# Altium PCB MainBoard_PCB.PcbDoc
Units mm, origin at the board's own origin, x right, y up, seen from the top; angles counter-clockwise.
Board outline 123.19 x 80.01 mm, 2 copper layers (Top Layer, Bottom Layer); 21 components, 31 nets, 92 pads, 0 vias.
Unrouted connection lines stored in the file: 2.
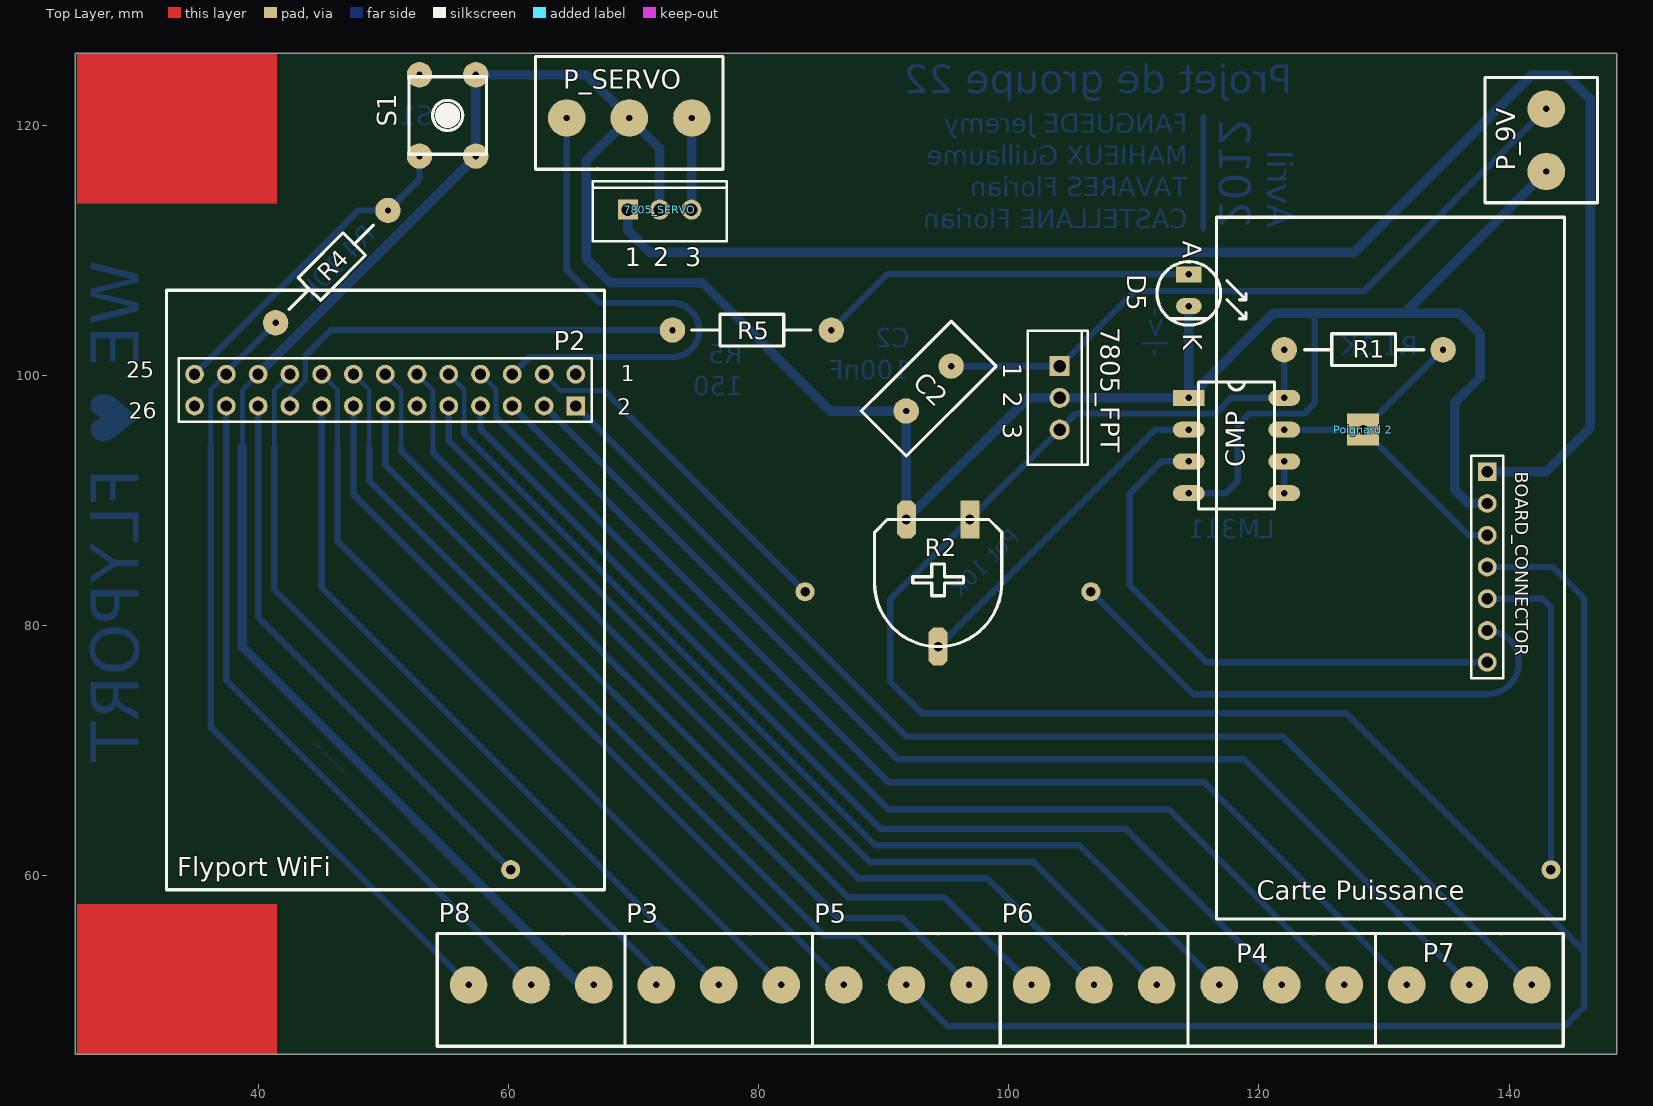
[diagram p0: Top Layer view]
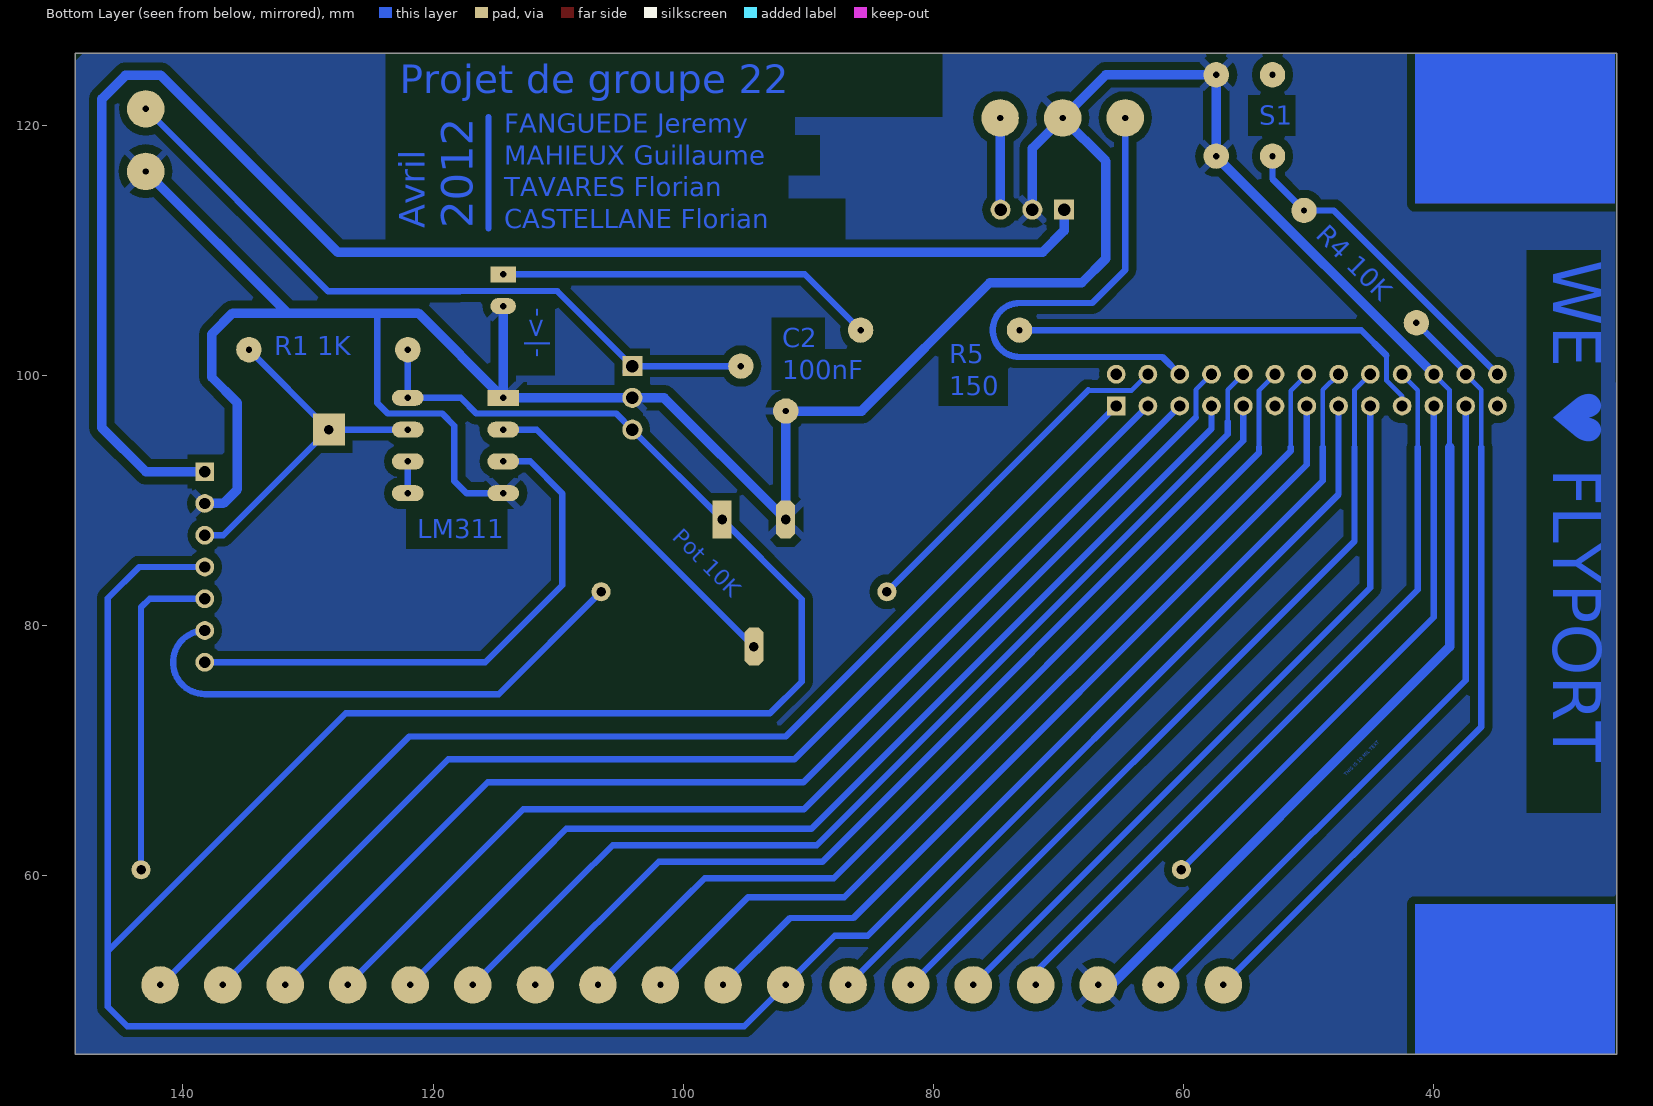
[diagram p1: Bottom Layer view, seen from below]

## Layer stack, top to bottom
Top Layer: signal copper 0.0356
Dielectric: dielectric 0.32, FR-4, Dk 4.8
Bottom Layer: signal copper 0.0356

## Board outline
25.4,125.73 148.59,125.73 148.59,45.72 25.4,45.72

## Design rules (kind name [scope] priority, off if disabled: settings)
Clearance [All] p1: gap=0.305
PlaneConnect [All] p1: planeconnectstyle=Relief reliefexpansion=0.508 reliefentries=4 reliefconductorwidth=0.508 reliefairgap=0.254
PolygonConnect [All] p1: connectstyle=Relief reliefconductorwidth=0.508 reliefentries=4 polygonreliefangle="45 Angle"
RoutingVias [All] p1: holewidth=0.508 width=1.524 viastyle="Through Hole" minholewidth=0.508 minwidth=1.524 maxholewidth=0.508 maxwidth=1.524
SilkscreenOverComponentPads [All] p1: minsilkscreentomaskgap=0.254
SolderMaskExpansion [All] p1: expansion=0.102
Width [All] p1: maxlimit=0.762 minlimit=0.381 preferedwidth=0.508
26 further rules are at their usual default settings.

## Components (designator, comment, footprint, x,y, rotation, side; value= is the part's Value field where it differs from the comment)
7805_FPT "SCR" TO-220-AB 104.075,98.2 r270 top
7805_SERVO "SCR" TO-220-AB 72.1,113.25 r0 top
BOARD_CONNECTOR "7 Pin Connector" HDR1X7 138.25,92.3 r270 top
C2 "Cap2" CAPA2 95.4,100.74 r225 top
CMP "LM311N" DIP8 114.4,98.2 r0 top
D5 "Led" LED 114.4,108.075 r270 top
P2 "Header 13X2" HDR2X13 65.4,97.55 r180 top
P3 "Bornier_3" Bornier_3 69.325,51.275 r0 top
P4 "Bornier_3" Bornier_3 114.325,51.275 r0 top
P5 "Bornier_3" Bornier_3 84.325,51.275 r0 top
P6 "Bornier_3" Bornier_3 99.325,51.275 r0 top
P7 "Bornier_3" Bornier_3 129.325,51.275 r0 top
P8 "Bornier_3" Bornier_3 54.325,51.275 r0 top
P_9V "Alim 9V" Bornier_2 142.975,123.8 r270 top
P_SERVO "Bornier Servomoteur" Bornier_3 77.175,120.575 r180 top
"Poignard 2" "Poignard" Poignard 128.332,95.66 r90 top
R1 "Res2" res5_1/4W 134.722,102.05 r180 top
R2 "RPot" AJUSTABLE 96.9,88.475 r180 top
R4 "Res2" res5_1/4W 41.4,104.2 r45 top
R5 "Res2" res5_1/4W 73.125,103.616 r0 top
S1 "SW-PB" SW_BP 55.15,120.775 r270 top

## Footprints (in the part's own frame and the unit in brackets; to place one, negate y for a bottom-side part, rotate by r counter-clockwise, add the part's x,y. Pads: shape width x height; smd on the part's side, far side on the other; paste and mask are expansions set on the pad)
AJUSTABLE [mil]
  rect 60x120 hole 30: 1(0,0)
  oct 60x120 hole 30: 2(100,400) 3(200,0)
  silkscreen extent -100,0 300,400
Bornier_2 [mm]
  round 3 hole 0.508: 1(2.5,0) 2(7.5,0)
  silkscreen extent 0,-4.9 10,4.1
Bornier_3 [mm]
  round 3 hole 0.508: 1(2.5,0) 2(7.5,0) 3(12.5,0)
  silkscreen extent 0,-4.9 15,4.1
CAPA2 [mil]
  round 80 hole 20: 1(0,0) 2(200,0)
  silkscreen extent -100,-100 300,100
DIP8 [mil]
  rect 100x50 hole 20: 1(0,0)
  oval 100x50 hole 20: 2(0,-100) 3(0,-200) 4(0,-300) 5(300,-300) 6(300,-200) 7(300,-100) 8(300,0)
  silkscreen extent 30,-350 270,50
HDR1X7 [mm] "Connector; Header; 7 Position"
  rect 1.5x1.5 hole 0.9: 1(0,0)
  round 1.5 hole 0.9: 2(2.54,0) 3(5.08,0) 4(7.62,0) 5(10.16,0) 6(12.7,0) 7(15.24,0)
  silkscreen extent -1.27,-1.27 16.51,1.27
HDR2X13 [mm] "Connector; Header; 13x2 Position"
  rect 1.5x1.5 hole 0.9: 1(0,0)
  round 1.5 hole 0.9: 2(0,-2.54) 3(2.54,0) 4(2.54,-2.54) 5(5.08,0) 6(5.08,-2.54) 7(7.62,0) 8(7.62,-2.54) 9(10.16,0) 10(10.16,-2.54) 11(12.7,0) 12(12.7,-2.54) 13(15.24,0) 14(15.24,-2.54) 15(17.78,0) 16(17.78,-2.54) 17(20.32,0) 18(20.32,-2.54) 19(22.86,0) 20(22.86,-2.54) 21(25.4,0) 22(25.4,-2.54) 23(27.94,0) 24(27.94,-2.54) 25(30.48,0) 26(30.48,-2.54)
  silkscreen extent -1.27,-3.81 31.75,1.27
LED [mil]
  rect 50x80 hole 20: 1(0,0)
  oval 50x80 hole 20: 2(100,0)
  silkscreen extent -40,-100 160,180
Poignard [mil]
  rect 100x100 hole 30: 1(0,0)
res5_1/4W [mil]
  round 80 hole 20: 1(0,0) 2(500,0)
  silkscreen extent 60,-50 435,50
SW_BP [mil]
  round 80 hole 20: 1(-127.95,88.58) 2(127.95,88.58) 3(-127.95,-88.58) 4(127.95,-88.58)
  silkscreen extent -122,-122 122,122
TO-220-AB [mm] "TO, Thru-Hole, Vertical, Heatsink Mounted; 3 In-Line Leads; Pitch 2.54 mm"
  rect 1.6x1.6 hole 1: 1(-2.54,0)
  round 1.6 hole 1: 2(0,0) 3(2.54,0)
  silkscreen extent -5.35,-2.55 5.35,2.25

## Part data
7805_FPT 7805_SERVO: "Silicon Controlled Rectifier"
BOARD_CONNECTOR: library part "Header 7", "Header, 7-Pin"
C2: "Capacitor"
CMP: "Voltage Comparator"
D5: "LED"
P2: "Header, 13-Pin, Dual row"
P3 P4 P5 P6 P7 P8: "Header, 3-Pin"
P_9V: library part Bornier_2, "Header, 2-Pin"
P_SERVO: library part Bornier_3, "Header, 3-Pin"
R1 R4 R5: "Resistor"
R2: "Potentiometer"
S1: "Switch"

## Free pads (board coordinates)
  round 1.524 hole 0.762: 2(83.72,82.7) 3(106.575,82.7) 4(143.35,60.475) 5(60.187,60.487)

## Nets (pads, with @x,y where several pads share a name; then routed paths per layer and width w, separated by ;. In a path a pad name is that pad's centre, name@x,y a point inside that pad or via, vN(x,y) a via of type N, cw(c..) or ccw(c..) an arc to the next point about the centre after c; other vN are vias at no path point)
3V3FLYPORT: P2.24 P8.1 R4.1 | length 63.6
  Bottom Layer w0.381: 36.215,94.25 36.215,98.845 P2.24 P2.24@37.46,100.26
  Bottom Layer w0.508: 36.215,94.25 36.215,71.885 P8.1 ; P2.24@37.46,100.26 R4.1
AN1_23: P2.23 P8.2 | length 56.4
  Bottom Layer w0.508: P2.23 37.46,75.64 P8.2
AN4_18: P2.18 P3.3 | length 64
  Bottom Layer w0.381: P2.18 46.35,98.82 46.35,94.241
  Bottom Layer w0.508: 46.35,94.241 46.35,86.75 P3.3
AN5_20: P2.20 P3.1 | length 62
  Bottom Layer w0.381: 41.295,94.241 41.295,98.795 42.54,100.041 P2.20 ; P3.1 P3.1@71.825,52.325
  Bottom Layer w0.508: 41.295,94.241 41.295,82.855 P3.1@71.825,52.325
BOARD_LED: P2.19 R5.1 | length 34.7
  Bottom Layer w0.381: P2.19 42.54,98.329 43.785,99.574 43.785,101.585
  Bottom Layer w0.508: 43.785,101.585 45.816,103.616 R5.1
CURRENT_SENSE: BOARD_CONNECTOR.7 CMP.3 | length 44.2
  Bottom Layer w0.508: CMP.3 112.245,93.12 109.675,90.55 109.675,83.225 115.84,77.06 BOARD_CONNECTOR.7
EN: "Poignard 2.1" BOARD_CONNECTOR.3 CMP.7 R1.1 | length 28.8
  Bottom Layer w0.508: CMP.7 128.332,95.66 ; R1.1 128.332,95.66 ; BOARD_CONNECTOR.3 136.771,87.22 128.332,95.66
GND: 7805_FPT.2 7805_SERVO.2 BOARD_CONNECTOR.2 C2.2 CMP.1 CMP.4 D5.2 P2.22 P8.3 P_9V.2 P_SERVO.2 R2.3 S1.1 S1.2 | length 282
  Bottom Layer w0.381: 38.755,94.241 38.755,98.845 P2.22
  Bottom Layer w0.508: S1.2 S1.2@57.418,117.508 ; P8.3@65.775,51.275 P8.3 ; R2.3@91.808,88.487 R2.3 ; 7805_FPT.2 7805_FPT.2@104.6,98.2 ; CMP.4 117.33,90.58 118.3,91.55 118.3,95.98 ; CMP.1 CMP.1@114.402,98.202 ; 118.305,95.98 119.275,96.95 123.62,96.95 124.46,97.79 124.46,104.975
  Bottom Layer w0.762: 38.75,94.241 38.75,78.3 P8.3@65.775,51.275 ; P2.22 S1.2@57.418,117.508 ; S1.2 S1.1 66.225,124.025 72.1,118.15 7805_SERVO.2 ; P_SERVO.2 66.225,117.125 66.225,109.325 68.15,107.4 75.5,107.4 85.752,97.148 C2.2 R2.3@91.808,88.487 ; R2.3@92.32,88.975 101.545,98.2 7805_FPT.2 ; 7805_FPT.2@104.6,98.2 CMP.1 ; D5.2@114.402,105.535 114.402,98.202 121.175,104.975 124.46,104.975 131.65,104.975 ; BOARD_CONNECTOR.2 136.771,89.76 135.65,90.881 135.65,97.8 137.7,99.85 137.7,103.3 136.025,104.975 132.975,104.975 131.65,104.975 ; P_9V.2 131.65,104.975
I2C_CLK: P2.1 P7.3 | length 95.9
  Bottom Layer w0.508: P2.1 91.825,71.125 121.9,71.125 P7.3@142.025,51
I2C_DATA: P2.3 P7.2 | length 93.1
  Bottom Layer w0.508: P2.3 91.11,69.3 118.8,69.3 P7.2
IN1: P2.5 P7.1 | length 90.7
  Bottom Layer w0.508: P2.5 90.395,67.475 115.625,67.475 P7.1
IN2: P2.7 P4.2 | length 84.3
  Bottom Layer w0.508: P2.7 57.78,95.72 89.75,63.75 109.35,63.75 111.175,61.925 P4.2
IN3: P2.9 P6.3 | length 77.4
  Bottom Layer w0.508: P2.9 55.24,94.76 88.875,61.125 101.975,61.125 P6.3
NetCMP_2: CMP.2 R2.2 | length 27.2
  Bottom Layer w0.508: R2.2 111.705,95.66 CMP.2
NetCMP_5: CMP.5 CMP.6 | length 2.5
  Bottom Layer w0.508: CMP.5 CMP.6
NetD5_1: D5.1 R5.2 | length 30.4
  Bottom Layer w0.508: R5.2 90.284,108.075 D5.1
OUT3_PWM: P2.17 P3.2 | length 59.4
  Bottom Layer w0.508: P2.17 45.08,83.02 P3.2
PWM1: BOARD_CONNECTOR.6 P2.4 pad.2 pad.3 | length 71.1
  Bottom Layer w0.381: P2.4 64.155,98.795 67.625,98.795
  Bottom Layer w0.508: 67.625,98.795 pad.2 ; pad.3 114.755,74.52 138.25,74.52 ccw(c138.25,77.06) BOARD_CONNECTOR.6
PWM2: BOARD_CONNECTOR.5 P2.21 pad.4 pad.5 | length 71.8
  Bottom Layer w0.508: P2.21 40,80.675 pad.5 ; BOARD_CONNECTOR.5 142.66,82.14 143.35,81.45 pad.4
PWM_SERVO: P2.6 P_SERVO.3 | length 41.8
  Bottom Layer w0.508: P2.6 61.694,101.464 73.1,101.464 ccw(c73.1,103.623) 73.1,105.782 67.318,105.782 64.675,108.425 P_SERVO.3
RST_B: P2.26 R4.2 S1.4 | length 26.4
  Bottom Layer w0.508: P2.26 48.01,113.18 R4.2 ; R4.2@50.38,113.355 R4.2 ; S1.4 52.9,115.7 R4.2
RX: P2.13 P5.3 | length 69
  Bottom Layer w0.381: P5.3@96.435,51.275 P5.3
  Bottom Layer w0.508: P2.13 50.16,92.865 86.4,56.625 91.475,56.625 P5.3
SPI_CLK_8: P2.8 P4.3 | length 90.6
  Bottom Layer w0.381: P2.8 59.025,98.845 59.025,96.625
  Bottom Layer w0.508: 59.025,96.625 90.35,65.3 112.8,65.3 118.225,59.875 P4.3
SPI_CS_14: P2.14 P6.1 | length 74.7
  Bottom Layer w0.381: P2.14 50.16,100.041 51.45,98.751 51.45,94.25
  Bottom Layer w0.508: 51.45,94.25 51.45,93.95 87.125,58.275 94.825,58.275 96.4,56.7 P6.1
SPI_IN_12: P2.12 P6.2 | length 77.3
  Bottom Layer w0.381: P2.12 53.975,98.815 53.975,94.25
  Bottom Layer w0.508: 53.975,94.25 53.975,93.8 87.975,59.8 98.3,59.8 100.125,57.975 P6.2
SPI_OUT_10: P2.10 P4.1 | length 83.9
  Bottom Layer w0.381: P2.10 56.485,98.845 56.485,96.29
  Bottom Layer w0.508: 56.485,96.29 56.485,95.29 89.325,62.45 105.65,62.45 108.712,59.387 P4.1
TX: P2.15 P5.1 | length 62.5
  Bottom Layer w0.508: P2.15 47.62,90.48 P5.1
V_5V_FPT: 7805_FPT.3 BOARD_CONNECTOR.4 CMP.8 P2.16 P5.2 R1.2 R2.1 | length 279.1
  Bottom Layer w0.381: P2.16 48.875,98.835 48.875,94.25
  Bottom Layer w0.508: 48.875,94.25 48.875,91.581 85.256,55.2 87.9,55.2 P5.2 95.125,47.975 144.45,47.975 146,49.525 146,53.95 ; R1.2 122.022,98.202 CMP.8 117.8,98.2 116.55,96.95 105.365,96.95 7805_FPT.3 104.075,95.65 R2.1 90.535,82.11 90.535,75.515 93.075,72.975 94.8,72.975 126.975,72.975 146,53.95 ; BOARD_CONNECTOR.4@138.408,84.682 143.486,84.682 146,82.168 146,53.95
V_5V_SERVO: 7805_SERVO.3 P_SERVO.1 | length 7.3
  Bottom Layer w0.508: 7805_SERVO.3 7805_SERVO.3@74.675,113.285
  Bottom Layer w0.762: 7805_SERVO.3@74.675,113.285 P_SERVO.1
V_9V: 7805_FPT.1 C2.1 P_9V.1 | length 56.2
  Bottom Layer w0.483: 7805_FPT.1@104.079,100.74 110.064,106.725 117.875,106.723
  Bottom Layer w0.508: C2.1 7805_FPT.1@104.079,100.74 ; 7805_FPT.1@104.6,100.24 7805_FPT.1@104.6,100.325 ; 117.875,106.723 128.398,106.723 P_9V.1
V_BAT: 7805_SERVO.1 BOARD_CONNECTOR.1 | length 121.9
  Bottom Layer w0.762: 7805_SERVO.1 69.56,111.565 71.27,109.855 127.635,109.855 141.755,123.975 144.6,123.975 146.475,122.1 146.475,95.8 142.975,92.3 BOARD_CONNECTOR.1
pads on no net: P2.2 P2.11 P2.25 S1.3
copper on no net: | length 8.9
  Bottom Layer w0.508: 115.57,111.76 115.57,120.65

## Polygon pours and split planes (outlines as drawn)
GND on Bottom Layer "Bottom Layer-No Net" (solid, remove dead copper, pour order 2): 25.525,125.725 25.53,125.73 147.955,125.73 148.59,125.095 148.59,45.72 25.4,45.72

## Other copper
Bottom Layer:
  text "Projet de groupe 22" at 122.682,122.555 h2.29
  text "S1" at 53.975,120.015 h1.52
  text "FANGUEDE Jeremy" at 114.3,119.38 h1.52
  text "MAHIEUX Guillaume" at 114.3,116.84 h1.52
  text "TAVARES Florian" at 114.3,114.3 h1.52
  text "CASTELLANE Florian" at 114.3,111.76 h1.52
  text "2012" at 116.84,111.76 h2.54 r270
  text "Avril" at 120.65,111.76 h2.03 r270
  text "R4 10K" at 49.53,111.125 h1.52 r45
  text "WE ♥ FLYPORT" at 31.75,109.22 h6.6 r90
  text "->|-" at 111.125,105.41 h1.52 r270
  text "C2" at 92.075,102.235 h1.52
  text "R1 1K" at 132.715,101.6 h1.52
  text "R5" at 78.74,100.965 h1.52
  text "100nF" at 92.075,99.695 h1.52
  text "150" at 78.74,98.425 h1.52
  text "Pot 10K" at 100.965,86.995 h1.27 r45
  text "LM311" at 121.285,86.995 h1.52
  text "THIS IS 10 MIL TEXT" at 46.99,67.945 h0.25 r315
Multi-Layer:
  rectangle: 25.525,113.73 41.525,125.725
  rectangle: 25.525,45.73 41.525,57.725

## Silkscreen, mask and mechanical layers (free items; w line width, h text height)
Top Overlay:
  lines w0.254: 32.675,58.875 67.7,58.875 67.7,106.8 32.675,106.8 32.675,58.875 ; 116.6,56.55 144.425,56.55 144.425,112.634 116.6,112.634 116.6,56.55
  text "Flyport WiFi" at 33.525,59.95 h1.52
  text "Carte Puissance" at 119.825,58.075 h1.52

## Dimensions
148.59,45.72 to 148.59,125.73 on Top Layer
148.59,45.72 to 25.4,45.72 on Top Layer

## Text inside footprints (layer, text, board x,y; h text height)
7805_FPT: Top Overlay "1" at 99.55,100.99 h1.5 r270; Top Overlay "2" at 99.55,98.7 h1.5 r270; Top Overlay "3" at 99.55,96.16 h1.5 r270
7805_SERVO: Top Overlay "1" at 69.31,108.725 h1.5; Top Overlay "2" at 71.6,108.725 h1.5; Top Overlay "3" at 74.14,108.725 h1.5
D5: Top Overlay "K" at 113.948,103.35 h1.52 r270; Top Overlay "A" at 113.898,110.75 h1.52 r270
P2: Top Overlay "26" at 29.65,96.525 h1.27; Top Overlay "25" at 29.45,99.8 h1.27; Top Overlay "1" at 68.975,99.525 h1.27; Top Overlay "2" at 68.7,96.85 h1.27